# Altium PCB pcb_multilayer.pcbdoc (part 2 of 3)
Units mil, origin at the board's own origin, x right, y up, seen from the top; angles counter-clockwise.
Board outline 8907.73 x 8667.62 mil, 2 copper layers (Top Layer, Bottom Layer); 214 components, 207 nets, 845 pads, 446 vias.
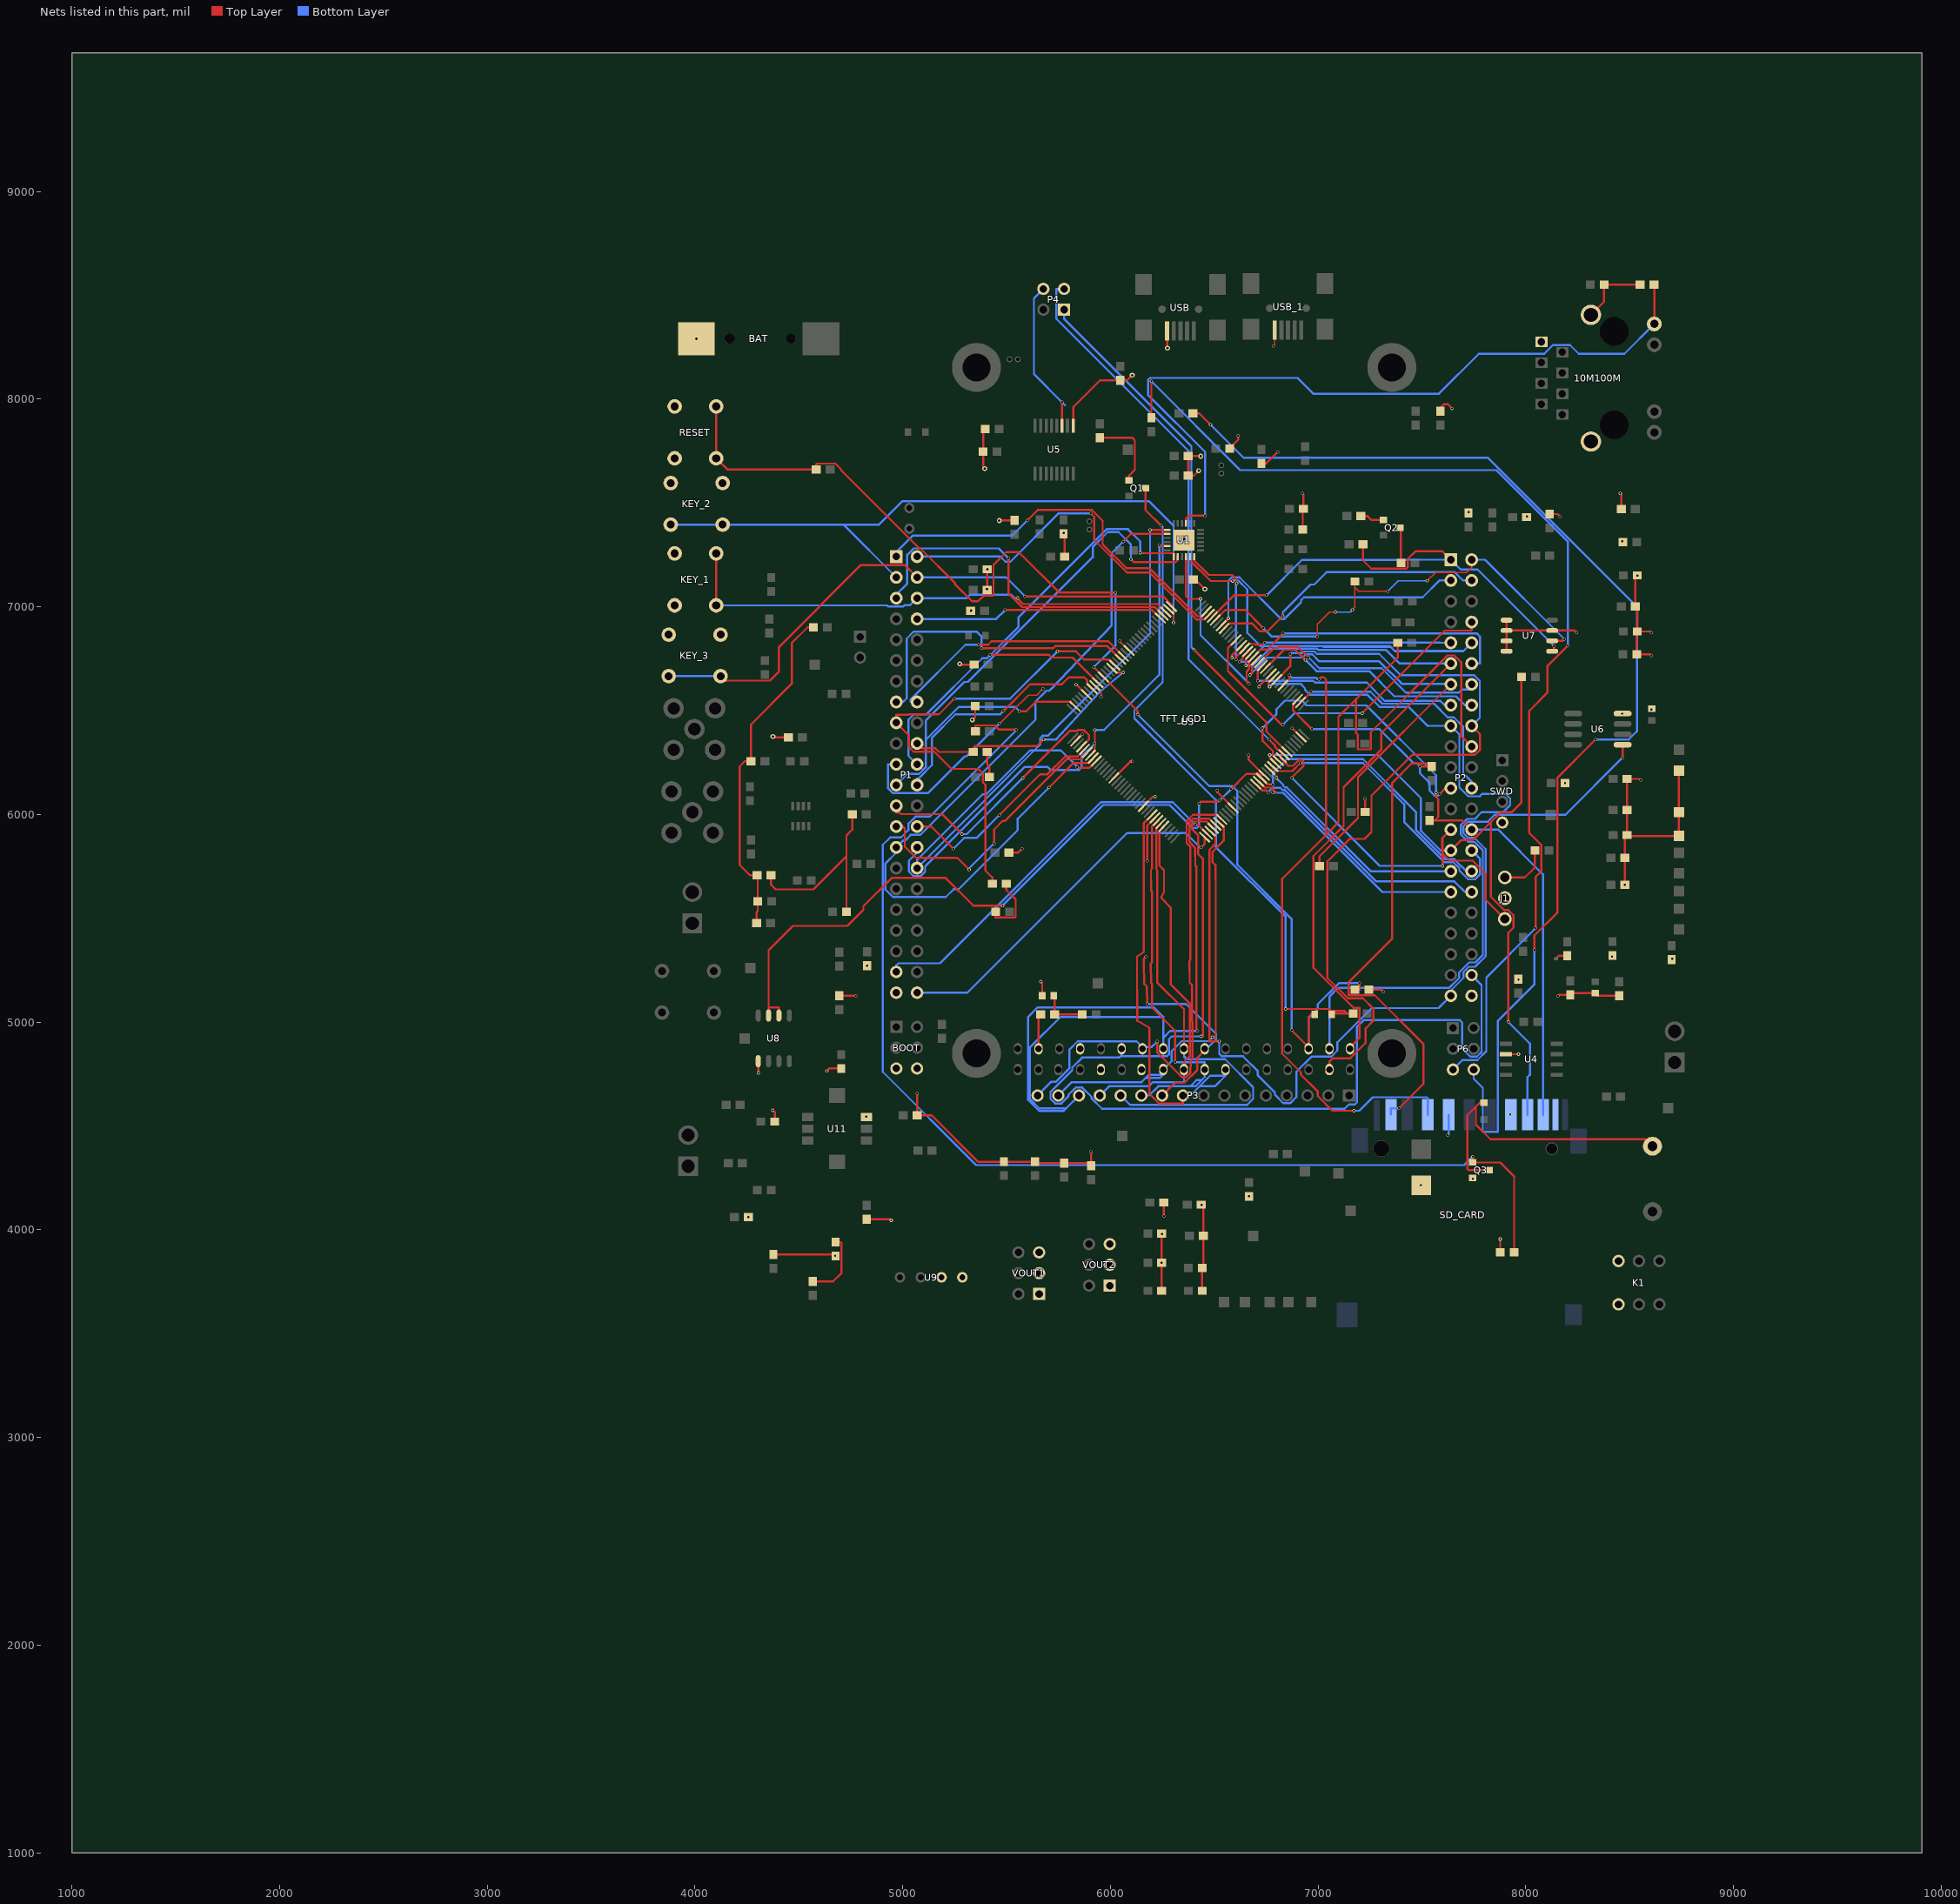
[diagram p2: the nets of this part, all layers, seen from the top]

## Via types
v1: diameter 15, hole 10, Top Layer to Bottom Layer, tented both sides, 426 vias
v2: diameter 24, hole 12, Top Layer to Bottom Layer, tented both sides, 20 vias

## Nets (pads, with @x,y where several pads share a name; then routed paths per layer and width w, separated by ;. In a path a pad name is that pad's centre, name@x,y a point inside that pad or via, vN(x,y) a via of type N, cw(c..) or ccw(c..) an arc to the next point about the centre after c; other vN are vias at no path point) (continued)
FSMC_D8: P3.9 TFT_LCD1.14 U3.64 | length 2048.6
  Top Layer w10: U3.64@6201.01,5997.75 6160,5956.74 6160,5337.34 6128,5314.84 6129,5005.72 6188,4973 6188,4654.22 6234.22,4608 6349.22,4608 P3.9@6349.22,4646.32
  Bottom Layer w10: P3.9@6349.22,4646.32 6385.32,4646.32 6431,4692 ; TFT_LCD1.14@6554.22,4771.32 6554.22,4741.22 ; 6431,4692 6480.22,4741.22 6554.22,4741.22 ; 6431,4692 6505,4692 6554.22,4741.22
FSMC_D9: P3.10 TFT_LCD1.15 U3.65 | length 1752.1
  Top Layer w10: v1@6169.83,5314.65 6161.15,5305.96 6161.15,5286.49 6162.21,5184 6175.64,5172 v1(6177,5087) ; v1@6177.77,5776 6177,5945.47 U3.65@6215.39,5983.86 ; P3.10@6249.22,4646.32 6311.9,4709 6357.9,4709 6419,4770.1 6419,4827.78 6454.22,4863 TFT_LCD1.15@6454.22,4871.32
  Mid-Layer 1 w10: v1(6171.62,5315.28) 6177.85,5321.51 v1@6177.85,5775.56
  Bottom Layer w10: v1(6177,5087) 6364.98,5087 6509.13,4942.85 6509.13,4917.38 6463.07,4871.32 TFT_LCD1.15@6454.22,4871.32
  other v1: 6178.08,5776.7
FSMC_D10: P3.11 TFT_LCD1.16 U3.66 | length 1851.2
  Top Layer w10: U3.66@6229.06,5970.66 6200.47,5942.07 6200.47,5740.97 6195.47,5732.55 6196,5636 6200.47,5625.71 6200.47,5287.14 6194.42,5281.35 6195.73,5188.45 6200.47,5183.72 6200.47,5069.53 6311,4959 v1(6311,4808)
  Bottom Layer w10: P3.11@6149.22,4646.32 6186.04,4646.32 6230.54,4690.82 6384.72,4690.82 ; v1(6311,4808) 6312,4807 6454.22,4807 TFT_LCD1.16@6454.22,4771.32 6454.22,4735 6439.26,4720.04 ; 6384.72,4690.82 6413.94,4720.04 6439.26,4720.04 ; 6384.72,4690.82 6410.04,4690.82 6439.26,4720.04
FSMC_D11: P3.12 TFT_LCD1.17 U3.67 | length 2329.1
  Top Layer w10: U3.67@6243.45,5956.77 6222,5935.32 6222,5735.97 6225,5730.45 6225,5190.89 6354.22,5061.67 TFT_LCD1.17@6354.22,4871.32
  Bottom Layer w10: P3.12@6049.22,4646.32 6094.54,4601 6658.86,4601 ; TFT_LCD1.17@6354.22,4871.32 6354.22,4836.5 ; 6657.4,4601 6687.2,4630.8 6687.2,4685.8 6552,4821 6369.72,4821 ; 6354.22,4836.5 6369.72,4821 ; 6354.22,4836.5 6354.22,4831.78 6365,4821 6369.72,4821
FSMC_D12: P3.13 TFT_LCD1.18 U3.68 | length 1752.1
  Top Layer w10: U3.68@6257.83,5942.87 6236,5920.29 6236,5753.67 6258,5731.67 6258,5626 6244.68,5599.53 6291,5549 6291,5180.53 6382,5089.53 6382,4836 6354.22,4808.22 TFT_LCD1.18@6354.22,4771.32
  Bottom Layer w10: P3.13@5949.22,4646.32 5993.72,4690.82 6184.72,4690.82 6204.72,4710.82 6272,4710.82 6354.22,4710.82 6354.22,4756 TFT_LCD1.18@6354.22,4771.32
FSMC_D13: P3.14 TFT_LCD1.19 U3.77 | length 4029.7
  Top Layer w10: v1(6418,4957) 6414.66,4957 6414.66,5747.31 6408.7,5753.98 6408.28,5836 6380.34,5871.05 6380.34,5962.03 6397.31,5979 6476.35,5979 U3.77@6508.11,5947.24
  Bottom Layer w10: P3.14@5849.22,4646.32 5787.18,4584.28 ; TFT_LCD1.19@6254.22,4871.32 6254.22,4923.22 ; v1(6418,4957) 6288,4957 6254.22,4923.22 ; 5787.18,4584.28 5658.18,4584.28 5611.51,4630.95 5611.51,4875.95 5760.56,5025 6254.22,5025 ; 5787.18,4584.28 5774.9,4572 5657,4572 5604,4625 5604,5025 5649,5070 6209.22,5070 6254.22,5025 ; 6254.22,4923.22 6254.22,5025
FSMC_D14: P3.15 TFT_LCD1.20 U3.78 | length 2079.7
  Top Layer w10: v1(6491.87,4926.87) 6507.18,4926.87 6507.18,5620 6505.88,5755.64 6491.61,5769.91 6491.61,5819.66 6545.25,5873.3 6545.25,5938.39 U3.78@6522.01,5961.63
  Bottom Layer w10: P3.15@5749.22,4646.32 5813.72,4710.82 6150.54,4710.82 6170.54,4730.82 ; TFT_LCD1.20@6254.22,4771.32 TFT_LCD1.20@6254.22,4771 ; v1(6491.87,4926.87) 6473,4908 6343.22,4908 6294.91,4859.69 6294.91,4811.69 TFT_LCD1.20@6254.22,4771 ; 6170.54,4730.82 6238.82,4730.82 TFT_LCD1.20@6254.22,4746.22 ; 6170.54,4730.82 6185.94,4746.22 TFT_LCD1.20@6254.22,4746.22 ; TFT_LCD1.20@6254.22,4746.22 TFT_LCD1.20@6254.22,4771
FSMC_D15: P3.16 TFT_LCD1.21 U3.79 | length 2450.4
  Top Layer w10: v1(6226,4907) 6226,4852.37 6342.69,4735.69 6365.69,4735.69 6385.39,4755.39 6386.46,4808.75 6395.83,4828 6393.84,5177 6381.49,5189.46 6380.57,5292.04 6385.39,5304.27 6385.39,5844.69 6367.1,5862.98 6367.1,5967.48 6397.62,5998 6513.92,5998 U3.79@6535.9,5976.02
  Bottom Layer w10: P3.16@5649.22,4646.32 5715.48,4712.58 5738.48,4712.58 5802,4776.1 5803,4777.1 5803,4868.1 5842.18,4907.28 6125.94,4907.28 6154.22,4879 6198,4879 v1(6226,4907)
FSMC_NBL0: P1.2 U3.141 | length 1800.7
  Top Layer w10: v1(5905,7450) 5922,7433 5922,7322 6079,7165 6188,7165 6414,6939 6452.98,6939 U3.141@6476.95,6962.97
  Bottom Layer w10: P1.2@5069.22,7241.32 5470.68,7241.32 5494.72,7217.28 5518.28,7217.28 5751,7450 v1(5905,7450)
FSMC_NBL1: P1.1 U3.142 | length 1919.3
  Top Layer w10: v1(5600,7416) 5650.2,7466.2 5910.8,7466.2 5963,7414 5963,7300 6077,7186 6187,7186 6419,6954 6439.7,6954 U3.142@6462.56,6976.86
  Bottom Layer w10: P1.1@4969.22,7241.32 4947,7241.32 5047.68,7342 5526,7342 v1(5600,7416)
FSMC_NE3: P2.13 R13.1 U3.125 | length 2293.6
  Top Layer w10: v1(6672,6671.5) 6672,6674 6681.6,6683.6 6681.6,6722.21 U3.125@6703.54,6744.15 ; R13.1@7007.11,5750.62 7007.11,5798 7192.11,5983 7192.11,6179.21 P2.13@7639.22,6626.32
  Bottom Layer w10: v1(6672,6671.5) 6755.5,6755 6925,6755 6941.53,6771.53 6971,6771.53 7005.53,6737 7295,6737 7403,6629 7639.22,6629 P2.13@7639.22,6626.32
FSMC_NE4: P2.11 TFT_LCD1.1 U3.127 | length 3371.5
  Top Layer w10: v1(6652,6717.5) 6652,6749.18 U3.127@6674.76,6771.94 ; TFT_LCD1.1@7154.22,4871.32 7154.22,4879 7199,4923.78 7199,5069 7170,5069 6977.34,5261.66 6977.34,5799.34 7123,5945 7123,6131 7305,6313 7305,6392.1 P2.11@7639.22,6726.32
  Bottom Layer w10: v1(6652,6717.5) 6653.5,6716 6684.5,6716 6766.03,6797.53 6995.61,6797.53 7001.87,6791.27 7327.73,6791.27 7392.68,6726.32 P2.11@7639.22,6726.32
FSMC_NOE: P2.18 TFT_LCD1.4 U3.118 | length 3826.4
  Top Layer w10: U3.118@6802.09,6648.98 6866,6712.89 v1(6866,6773) ; TFT_LCD1.4@7054.22,4771.32 7054.22,4809 7070.22,4825 7155,4825 7229,4899 7229,4969 7265.77,5005.77 7265.77,5064.77 7216.54,5114 7143.54,5114 7044.54,5212.99 7044.54,5773.54 7153,5882 7224,5882 7257,5915 7257,6090 7454,6287 7755.46,6287 7780,6311.54 7780,6385.54 P2.18@7739.22,6426.32
  Bottom Layer w10: v1(6866,6773) 6870.52,6777.52 6925.61,6777.52 6932.62,6784.53 6982.61,6784.53 6994.14,6773 7294,6773 7397,6670 7751.6,6670 7778.47,6643.13 7778.47,6465.25 7739.22,6426 P2.18@7739.22,6426.32
FSMC_NWE: P2.17 TFT_LCD1.3 U3.119 | length 3705.6
  Top Layer w10: v1(6767,6615) 6761.8,6615 6761.8,6635.56 U3.119@6788.42,6662.18
  Bottom Layer w10: v1(6767,6615) 6781,6629 6915.5,6629 6936.83,6607.67 6936.83,6599.67 6961,6575.5 7238.11,6575.5 7295.61,6518 7435,6518 7527,6426 7639.06,6426.16 P2.17@7639.22,6426.32 7680,6385.54 7680,6130.34 7723.17,6087.17 7778.17,6087.17 7789.48,6098.48 7902.52,6098.48 7925.14,6075.86 7925.14,6044.86 7891.4,6011.12 7788.12,6011.12 7755.32,5978.32 7717.32,5978.32 7686.91,5947.91 7686.91,5904.09 7724,5867 7754,5867 7793.35,5827.65 7793.35,5322.35 7758,5287 7727,5287 7679,5239 7679,5212 7632,5165 7097,5165 7054.22,5122.22 TFT_LCD1.3@7054.22,4871.32
GND: 10M100M.8 10M100M.13 10M100M.14 BAT.2 BOOT.5 BOOT.6 C1.1 C2.1 C3.1 C4.1 C5.1 C6.1 C7.1 C8.1 C9.1 C10.1 C11.1 C12.1 C13.1 C14.1 C15.1 C16.1 C17.1 C18.2 C19.1 C20.1 C21.1 C22.1 C23.1 C24.1 C25.2 C26.2 C27.1 C28.1 C29.1 C30.1 C31.1 C32.1 C33.1 C34.1 C35.1 C36.1 C37.1 C38.1 C39.1 C40.1 C41.1 C42.1 C43.1 C44.2 C45.2 C46.2 C47.1 C48.1 C49.1 C50.1 C51.1 C52.2 C53.2 C54.1 C55.2 C57.2 C59.1 C69.1 C71.1 D9.1 GND.P$1 J1.2 KEY_1.1 KEY_2.1 KEY_3.1 P1.43 P2.44 POWER.2 Q3.2 R6.2 R7.2 R8.1 R9.1 R11.1 R12.1 R19.2 R35.1 R43.1 R49.1 R58.2 R59.2 RESET.2 SD_CARD.3 SD_CARD.6 SWD.4 TFT_LCD1.22 TFT_LCD1.26 TFT_LCD1.27 TP1.P$1 U1.25 U3.16 U3.31 U3.38 U3.51 U3.61 U3.83 U3.94 U3.107 U3.120 U3.130 U4.2 U5.1 U6.4 U7.1 U7.2 U7.3 U7.4 U7.7 U8.5 U9.3 U9.4 U11.4 USB.5 USB_1.5 VOUT1.1 VOUT1.3 VOUT1.5 VOUT2.1 VOUT2.3 VOUT2.5 | length 42495.3
  Top Layer w6: v1(6785,8255) 6791,8261 USB_1.5@6791,8333
  Top Layer w10: U8.5@4304.22,4811.32 v1(4305,4755) ; v1(4375,4575) 4384.11,4565.89 R58.2@4384.11,4520.62 ; v2(4375,6375) 4379.38,6370.62 R59.2@4450.11,6370.62 ; C29.1@4377.11,3880.62 4670.11,3880.62 POWER.2@4677.11,3873.62 ; v1(4635,4765) 4646.32,4776.32 C69.1@4704.22,4776.32 ; C51.1@4694.22,5126.32 4773.68,5126.32 v1(4775,5125) ; C59.1@4827.11,4050.62 4939.38,4050.62 v1(4945,4045) ; v1(5069.22,4655) C50.1@5069.22,4551.32 5138.68,4551.32 5362.38,4327.62 C55.2@5487.11,4327.62 C45.2@5637.11,4327.62 5644.11,4320.62 C48.1@5777.11,4320.62 5894.11,4320.62 C44.2@5907.11,4307.62 5907.11,4372.89 v1(5905,4375) ; v2(5275,6725) 5278.68,6721.32 C27.1@5344.22,6721.32 ; v2(5335,6455) 5349.22,6469.22 C28.1@5349.22,6521.32 ; v2(5395,7665) 5387.22,7672.78 C53.2@5387.22,7746.32 5387.22,7846.32 C52.2@5397.22,7856.32 ; C43.1@5407.11,7080.62 v2(5407.11,7180.62) ; v2(5465,7415) 5466.32,7416.32 C22.1@5539.22,7416.32 ; C25.2@5511.22,5816.32 5556.32,5816.32 v1(5575,5835) ; v1(5665,5195) 5671.67,5188.33 C17.1@5671.67,5126.32 ; C23.1@5774.22,7351.32 5779.22,7346.32 C20.1@5779.22,7241.32 ; U5.1@5821.22,7871.32 5821.22,7961.22 5950.62,8090.62 C47.1@6047.12,8090.62 6080.62,8090.62 v2(6105,8115) ; U3.38@5832.7,6353.42 v1(5865,6385) ; v1(5835,6625) 5846.77,6615 U3.31@5884.67,6577.1 ; U3.51@6016.86,6175.59 6096.27,6255 v1(6105,6255) ; v1(6045,6835) 6045,6833.89 U3.16@6089.59,6789.3 ; U3.61@6158.57,6038.74 6204.83,6085 v1(6215,6085) ; C33.1@6247.11,3705.62 v1(6247.11,3840.62) C35.1@6247.11,3980.62 ; v1(6257.11,4065) C36.1@6257.11,4130.62 ; USB.5@6273.11,8328.62 6273.11,8246.89 v2(6275,8245) ; R8.1@6399.22,7131.32 6408.68,7131.32 v2(6455,7085) ; v2(6425,7655) 6401.32,7631.32 C2.1@6374.22,7631.32 C1.1@6374.22,7726.32 6433.68,7726.32 v2(6435,7725) ; C54.1@6437.11,4120.62 6447.11,4110.62 C32.1@6447.11,3970.62 6447.11,3820.62 C31.1@6442.11,3815.62 C30.1@6442.11,3705.62 ; v1(6515,6115) 6515,6107.21 U3.83@6590.08,6032.13 ; C7.1@6574.22,7761.32 6574.22,7764.22 6615,7805 v1(6615,7825) ; v1(6585,6755) 6585,6765.6 U3.130@6632.32,6812.92 ; v1(6665,6285) 6665,6264.04 U3.94@6740.82,6188.22 ; v1(6715,6615) 6715,6617.04 U3.120@6774.03,6676.07 ; C6.1@6727.11,7690.62 6750.62,7690.62 v1(6805,7745) ; v1(6875,6415) 6876.03,6415 U3.107@6918.66,6372.37 ; v1(6925,7545) 6929.22,7540.78 R9.1@6929.22,7471.32 6926.22,7468.32 R19.2@6926.22,7371.32 ; v1(7225,6075) 7226.22,6073.78 C26.2@7226.22,6011.32 ; C24.1@7244.22,5156.32 7303.68,5156.32 v1(7315,5145) ; C14.1@7589.22,7941.32 7589.22,7959.22 7605,7975 7625,7975 v1(7645,7955) ; R49.1@7877.12,3890.62 v1(7877.12,3955) ; U4.2@7904.61,4845.62 v1(7965,4845) ; U7.4@7907.11,6785.62 U7.3@7907.11,6835.62 U7.2@7907.11,6885.62 ; U7.1@7907.11,6935.62 U7.2@7907.11,6885.62 ; C13.1@8114.22,7446.32 8153.68,7446.32 v1(8165,7435) ; v1(8145,5305) 8159.32,5319.32 C57.2@8199.22,5319.32 ; v1(8155,5125) 8161.32,5131.32 C38.1@8214.22,5131.32 8221.67,5138.77 C18.2@8334.22,5138.77 8346.67,5126.32 C49.1@8449.22,5126.32 ; v1(8245,6875) 8234.38,6885.62 U7.7@8127.11,6885.62 U7.2@7907.11,6885.62 ; 10M100M.14@8313.61,8405.62 8377.11,8469.12 R12.1@8377.11,8550.62 R6.2@8550.11,8550.62 ; v1(8455,7545) 8460.12,7539.88 R7.2@8460.12,7470.62 ; v1(8477.11,5660.62) C9.1@8477.11,5790.62 8477.11,5890.62 C16.1@8487.11,5900.62 ; v1(8537.11,7150.62) 8527.11,7140.62 C40.1@8527.11,7000.62 8537.11,6990.62 C41.1@8537.11,6880.62 ; v1(8555,6165) 8549.38,6170.62 C8.1@8487.11,6170.62 C15.1@8487.11,6020.62 C16.1@8487.11,5900.62 ; v1(8605,6765) 8599.38,6770.62 C46.2@8534.11,6770.62 8534.11,6877.62 C41.1@8537.11,6880.62 ; v1(8605,6875) 8599.38,6880.62 C41.1@8537.11,6880.62 ; TP1.P$1@8737.11,6210.62 GND.P$1@8737.11,6010.62 GND.P$1@8737.11,5895.62 8492.11,5895.62 C16.1@8487.11,5900.62
  Mid-Layer 1 w6: v2(6275,8245) 6775,8245 v1(6785,8255) ; v2(6455,7085) 6455,6995 6535,6915 6535,6895 6585,6845 v1(6585,6755)
  Mid-Layer 1 w10: 4005,8275 3902.11,8172.11 3902.11,8135 RESET.2@3902.11,7964.62 RESET.2@3902.11,7714.62 3902.11,7614.62 KEY_2.1@3883.11,7595.62 ; KEY_3.1@4123.11,6865.62 KEY_3.1@3873.11,6865.62 ; KEY_2.1@4133.11,7595.62 KEY_2.1@3883.11,7595.62 ; v1@4255,4055 4265,4045 v1(4945,4045) ; v1(4305,4755) 4295,4745 4295,4705 4375,4625 v1(4375,4575) 4425,4575 4615,4765 v1(4635,4765) ; v1(4675,3875) 4685,3885 4845,3885 4945,3985 v1(4945,4045) ; 4825,5265 4775,5215 v1(4775,5125) 4775,4995 4635,4855 v1(4635,4765) ; v1(4829.22,5271.32) 4839.22,5271.32 P1.43@4969.22,5141.32 ; BOOT.5@4969.22,4776.32 BOOT.6@5069.22,4776.32 v1(5069.22,4655) 4875,4655 4835,4615 4835,4555 v1(4825,4545) 4825,4595 4655,4765 v1(4635,4765) ; v2@5265,6725 v2(5275,6725) ; v2@5325,6985 5345,6965 5345,6915 5305,6875 5295,6875 5275,6855 v2(5275,6725) ; v2(5335,6455) 5215,6455 5135,6535 5135,6585 ; v2(5405,7085) 5415,7075 5455,7085 5465,7075 ; v2(5407.11,7180.62) 5407.11,7357.11 v2(5465,7415) ; VOUT1.1@5657.11,3690.62 VOUT1.3@5657.11,3790.62 ; v1(5775,7355) 5705,7285 5495,7285 5465,7315 v2(5465,7415) ; VOUT2.1@5997.11,3730.62 VOUT2.3@5997.11,3830.62 ; v1(6045,6835) 6015,6835 5985,6805 5985,6785 6115,6655 6115,6625 5995,6505 5965,6505 5845,6625 v1(5835,6625) 5795,6575 5795,6515 5865,6445 v1(5865,6385) 5885,6405 5895,6405 6045,6255 v1(6105,6255) ; TFT_LCD1.22@6149.22,4771.32 6149.22,4790.78 6125,4815 6025,4815 5981.32,4771.32 TFT_LCD1.26@5954.22,4771.32 ; v1@6245,3975 6257.11,3987.11 v1(6257.11,4065) 6385,4065 v1(6438.87,4118.86) 6628.86,4118.86 v1@6665,4155 ; v1(6247.11,3840.62) 6201.49,3795 6095,3795 6059.38,3830.62 VOUT2.3@5997.11,3830.62 ; v2(6425,7655) 6445,7655 6475,7625 6475,7365 6435,7325 v2(6355,7325) 6355,7175 6345,7165 6345,7085 6355,7075 6415,7075 6445,7075 v2(6455,7085) ; v1(6585,6755) 6585,6675 6655,6605 6705,6605 v1(6715,6615) 6715,6575 6835,6455 v1(6875,6415) ; v1(6925,7545) 6805,7665 v1(6805,7745) 6725,7825 v1(6615,7825) 6465,7825 6435,7795 v2(6435,7725) 6435,7735 6105,8065 v2(6105,8115) 6215,8235 6225,8242.83 6235,8245 v2(6275,8245) 5695,7665 v2(5395,7665) 5395,7445 5425,7415 v2(5465,7415) ; v1(7315,5145) 7385,5075 7695,5075 7739.22,5119.22 P2.44@7739.22,5126.32 ; v1(7495,4215) 7525,4245 v1(7745,4245) ; v1(7645,7955) 7725,7875 v1(7725,7455) 7745,7435 v1(8005,7435) v1(8165,7435) 8355,7435 8455,7535 v1(8455,7545) ; v1(7877.12,3955) 7877.12,4112.88 v1(7745,4245) ; J1.2@7899.22,5596.32 7955,5652.1 7955,5765 7887.11,5832.89 SWD.4@7887.11,5960.62 ; v1(8189.22,6151.32) 8189.22,6079.22 8065,5955 7892.73,5955 SWD.4@7887.11,5960.62 ; 8195,6145 8215,6125 8555,6125 v1(8555,6165) 8555,6265 8465,6355 v1(8465,6485) 8485,6505 v1(8605,6505) v1(8605,6765) ; v1(8245,6875) 8325,6875 8385,6935 8585,6935 8605,6915 v1(8605,6875) ; 10M100M.14@8313.61,8405.62 8183.61,8275.62 10M100M.8@8075.61,8275.62 8264.38,8275.62 8285,8255 8285,7824.23 10M100M.13@8313.61,7795.62 8313.61,7686.39 v1(8455,7545) ; v1@8475,5655 8475,5585 8415,5525 v1(8415,5315) ; v1@8535,7145 8525,7155 8525,7215 8465,7275 v1(8465,7315) 8455,7325 v1(8455,7545) ; v1(8705,5305) 8615,5305 8605,5315 v1(8415,5315) ; KEY_3.1@3873.11,6865.62 3873.11,6863.11 3815,6805 3815,6235 4145,6235 4275,6365 4365,6365 v2(4375,6375) 4375,6335 4395,6315 4595,6315 4745,6465 4825,6465 4845,6485 4845,6525 4905,6585 5135,6585 ; KEY_3.1@3873.11,6865.62 3902.11,6894.62 KEY_1.1@3902.11,7006.62 KEY_1.1@3902.11,7256.62 3873.73,7285 3835,7285 3815,7305 3815,7475 3883.11,7543.11 KEY_2.1@3883.11,7595.62 ; v1(4945,4045) 5187.11,3802.89 U9.3@5187.11,3770.62 U9.4@5287.11,3770.62 5312.73,3745 5625,3745 5657.11,3777.11 VOUT1.3@5657.11,3790.62 ; 5135,6585 v2(5275,6725) ; 5420.81,6980.81 v2(5329.19,6980.81) 5420.81,6980.81 ; 5420.81,6980.81 5465,7025 ; 5420.81,6980.81 5465,7025 ; 5465,7025 5465,7075 ; 5465,7025 5465,7075 ; VOUT1.3@5657.11,3790.62 VOUT1.5@5657.11,3890.62 5662.73,3885 5975,3885 5997.11,3907.11 VOUT2.5@5997.11,3930.62 ; TFT_LCD1.26@5954.22,4771.32 5954.22,4744.22 5905,4695 v1(5905,4375) 5985,4375 6015,4345 6015,3948.51 VOUT2.5@5997.11,3930.62 ; TFT_LCD1.26@5954.22,4771.32 TFT_LCD1.27@5854.22,4871.32 5828.68,4871.32 5795,4905 5795,5145 5745,5195 v1(5665,5195) 5575,5285 v1(5575,5835) 5945,6205 5965,6205 6015,6255 v1(6105,6255) ; VOUT2.3@5997.11,3830.62 VOUT2.5@5997.11,3930.62 ; v1(6105,6255) 6155,6205 6155,6165 6215,6105 v1(6215,6085) 6245,6115 v1(6515,6115) 6495,6135 6495,6155 6515,6175 6625,6285 v1(6665,6285) 6725,6345 6775,6395 6795,6415 v1(6875,6415) ; v1(6875,6415) 6885,6415 7045,6255 v1(7225,6075) 7305,6075 7315,6065 7315,6015 7355,5975 7775,5975 7789.38,5960.62 SWD.4@7887.11,5960.62 ; P2.44@7739.22,5126.32 7886.32,5126.32 v1(7965,5205) 8075,5205 v1(8155,5125) 8145,5135 v1(8145,5305) 8145,5285 8175,5255 8405,5255 8415,5265 v1(8415,5315) ; P2.44@7739.22,5126.32 7825,5040.54 7825,4995 7855,4965 7895,4965 7965,4895 v1(7965,4845) 7965,4745 7925,4705 v1(7925,4555) 7925,4475 7905,4455 v1(7625,4455) 7625,4355 7735,4245 v1(7745,4245)
  Bottom Layer w10: v1(7625,4455) 7628.55,4458.55 SD_CARD.3@7628.55,4553.54
  other v1: 6248.87,3978.86 6248.87,3978.86 4257.11,4060.62 6667.11,4160.62 8465,7315
  other v2: 4007.11,8290.62
IIC_SCL: P2.2 R41.2 U3.139 U7.6 | length 2313.6
  Top Layer w6: v1(6996,6856) 6996,6916 7055,6975 v1(7085,6975) ; v1(7165,6985) 7177.22,6997.22 R41.2@7177.22,7121.32 7177.22,7092.78 7195,7075 v1(7335,7075) ; v1(7525,7125) 7565,7165 7715,7165 7739.22,7189.22 P2.2@7739.22,7226.32
  Top Layer w10: U3.139@6505,6935.87 6554.13,6985 6649,6985 v1(6736,6898) ; U7.6@8127.11,6835.62 8177.62,6835.62 v1(8186,6844)
  Bottom Layer w6: v1(7085,6975) 7155,6975 v1(7165,6985) ; v1(7335,7075) 7385,7125 v1(7525,7125)
  Bottom Layer w10: v1(6736,6898) 6778,6856 v1(6996,6856) ; P2.2@7739.22,7226.32 7803.68,7226.32 v1(8186,6844)
IIC_SDA: P2.1 R42.2 U3.140 U7.5 | length 2559.3
  Top Layer w10: U3.140@6490.61,6949.77 6595.84,7055 v1(6752,7055) ; R42.2@7216.22,7301.32 7216.22,7223 7256,7183.22 7424.22,7183.22 7432,7191 7432,7230 7470,7268 7597.54,7268 P2.1@7639.22,7226.32 ; U7.5@8127.11,6785.62 8136,6785.62 v1(8136,6811)
  Bottom Layer w10: v1(6752,7055) 6923,7226 7432,7226 7432.32,7226.32 P2.1@7639.22,7226.32 7686.54,7179 7768,7179 v1(8136,6811)
J1_3: J1.3 R48.1 | length 246.5
  Top Layer w10: J1.3@7899.22,5696.32 7995.54,5696.32 8044.22,5745 R48.1@8044.22,5826.32
K1_1: K1.1
K1_6: K1.6
KEY0: KEY_1.2 P1.6 U3.3 | length 2477.9
  Top Layer w10: KEY_1.2@4102.11,7006.62 KEY_1.2@4102.11,7256.62 ; v1(5553,7042) 5553,7040 5580,7013 6227.88,7013 U3.3@6267.43,6973.45
  Bottom Layer w10: KEY_1.2@4102.11,7006.62 4923.38,7006.62 4928.33,7001.67 ; 4928,7001 4928.33,7001.67 ; v1(5553,7042) 5537,7042 5520.74,7058.26 5324.76,7058.26 5307.82,7041.32 P1.6@5069.22,7041.32 5035.9,7008 5009.68,7008 5003.35,7001.67 4928.33,7001.67
KEY1: KEY_2.2 P1.3 U3.2 | length 3417.8
  Top Layer w10: U3.2@6281.32,6987.84 6304,6965.16 v1(6304,6923)
  Bottom Layer w10: KEY_2.2@3883.11,7395.62 KEY_2.2@4133.11,7395.62 4714.92,7395.62 ; P1.3@4969.22,7141.32 4714.92,7395.62 ; v1(6304,6923) 6304,7390 6185.24,7508.76 4998.76,7508.76 4885.62,7395.62 4714.92,7395.62
KEY2: KEY_3.2 P1.4 U3.1 | length 2829.9
  Top Layer w10: KEY_3.2@4123.11,6665.62 4123.11,6644 4360,6644 4404,6688 4404,6806 4799,7201 5009.54,7201 P1.4@5069.22,7141.32 ; v1(5589,7050) 6253.52,7050 6294.52,7009 U3.1@6294.52,7001.51
  Bottom Layer w10: KEY_3.2@3873.11,6665.62 KEY_3.2@4123.11,6665.62 ; P1.4@5069.22,7141.32 5497.68,7141.32 v1(5589,7050)
L2_2: C64.2 C66.2 L2.2 L3.1 R52.1 | length 1665.1
  Top Layer w10: C64.2@4297.22,5476.32 4297.22,5529 4302.22,5534 C66.2@4302.22,5581.32 4302.22,5706.32 R52.1@4299.22,5706.32 4265,5706.32 4214.86,5756.46 4214.86,6230.86 4240.32,6256.32 L3.1@4269.22,6256.32 4269.22,6432.22 4466,6629 4466,6825 4541.62,6900.62 L2.2@4570.11,6900.62
LCD_BL: P2.42 TFT_LCD1.23 U3.76 | length 5233.6
  Top Layer w10: v1(6437,4931) 6446,4931 6446,5785.23 6421.73,5809.5 6421.73,5900.27 6393.57,5928.43 6393.57,5956.43 6402.63,5965.5 6462.99,5965.5 U3.76@6494.91,5933.58
  Bottom Layer w10: TFT_LCD1.23@6054.22,4871.32 6054.22,4841 ; v1(6437,4931) 6295.24,4931 6281.91,4917.67 6281.91,4844.67 6273,4835.76 6054.22,4835.76 6054.22,4841 ; P2.42@7739.22,5226.32 7787,5178.54 7787,4855.61 7765.08,4833.69 7733.08,4833.69 7694,4872.77 7694,4997.77 7682.69,5009.09 7219.09,5009.09 7187.24,4977.24 7187.24,4613.24 7177,4603 7148,4603 7127.49,4582.49 5959.51,4582.49 5910,4632 5910,4639 5864.65,4684.35 5833.35,4684.35 5798,4649 5798,4642 5764.18,4608.18 5734.23,4608.18 5711.61,4630.81 5711.61,4662.61 5816,4767 5816,4781 5864,4829 6042.22,4829 6054.22,4841
LED0: LED0.2 P1.17 U3.21 | length 2344.8
  Top Layer w10: v1(5250,6558) 5174,6482 5031,6482 5028,6479 4969.22,6479 P1.17@4969.22,6441.32 5029,6381.54 5029,6325.54 5052.54,6302 5152,6302 5235,6219 5364.12,6219 5386,6197.12 5386,6154.12 5397.85,6142.26 5397.85,5730.15 5432.22,5695.78 LED0.2@5432.22,5666.32 ; v1(5745,6785) 5834,6785 5873,6746 5994.33,6746 U3.21@6021.52,6718.81
  Bottom Layer w10: v1(5250,6558) 5518,6558 v1(5745,6785)
LED0_1: LED0.1 R44.1 | length 303.3
  Top Layer w10: R44.1@5447.12,5530.62 5447.12,5503.12 5539.54,5503.12 5543.78,5507.36 5543.78,5591.22 5499.22,5635.78 LED0.1@5499.22,5666.32
LED1: LED1.2 P1.20 U3.22 | length 1245.5
  Top Layer w10: P1.20@5069.22,6341.32 5092.17,6318.37 5156.75,6318.37 5174.5,6300.62 LED1.2@5340.11,6300.62 5340.11,6321 5348.11,6329 5646,6329 v1(5678,6361) ; U3.22@6007.62,6704.42 6029.04,6683 6062,6683 v1(6062,6684)
  Bottom Layer w10: v1(5678,6361) 5739,6361 5945,6585 5955,6595 v1(6062,6684)
LED1_1: LED1.1 R45.1 | length 124.1
  Top Layer w10: LED1.1@5407.11,6300.62 5407.11,6241 5417.11,6231 R45.1@5417.11,6180.62
LINK_LED: 10M100M.12 R6.1 U1.3 | length 3725.9
  Top Layer w10: U1.3@6364.06,7401.32 6364.06,7425.38 6377,7438.32 v1(6456,7438.32) ; R6.1@8617.11,8550.62 8618.61,8550.62 10M100M.12@8618.61,8361.62
  Bottom Layer w10: v1(6456,7438.32) 6456,7746 6181.26,8020.74 6181.26,8092.46 6190.46,8101.66 6901.34,8101.66 6977,8026 7582,8026 7774,8218 8089,8218 8130.72,8259.72 8213.28,8259.72 8255,8218 8474.99,8218 10M100M.12@8618.61,8361.62
P6_5: P6.5 R37.1 | length 5361.9
  Top Layer w10: R37.1@6197.12,7910.62 v1(6197.12,8086) ; v1(8048,5452) 8048,5699 8074.16,5725.16 8074.16,5853.84 8016.18,5911.82 8016.18,6498.18 8105,6587 8105,6715 v1(8202,6812)
  Bottom Layer w10: v1(6197.12,8086) 6625.12,7658 7858,7658 8202,7314 v1(8202,6812) ; P6.5@7649.22,4771.32 7694.9,4817 7766.9,4817 7810,4860.1 7810,5214 v1(8048,5452)
P6_6: P6.6 R38.1 | length 5814.2
  Top Layer w10: R38.1@6397.11,7930.62 6428.61,7930.62 v1(6482.23,7877) ; v1(8040.61,5346.01) 8040.61,5415.61 8153,5528 8153,6177 v1(8337,6361)
  Bottom Layer w10: v1(6482.23,7877) 6642.23,7717 7817.78,7717 8534.89,6999.89 8534.89,6399.89 8496,6361 v1(8337,6361) ; P6.6@7749.22,4771.32 7749.22,4726.78 7793,4683 7793,4470.54 7865,4470.54 7865,5005 8040.61,5180.61 v1(8040.61,5346.01)
PA1: P1.23 U1.14 U3.35 | length 2963.3
  Top Layer w10: v1(5562,6497) 5595,6497 5639.8,6541.8 5808.26,6541.8 U3.35@5829.79,6520.27 ; v1(6099,7229) 6113,7215 6314.69,7215 6324.69,7225 U1.14@6324.69,7241.32
  Bottom Layer w10: P1.23@4969.22,6141.32 5022.9,6195 5078.9,6195 5111,6227.1 5111,6358.1 ; v1(5562,6497) 5541,6518 5270.9,6518 5111,6358.1 ; v1(6099,7229) 6099,7299.8 6039.16,7359.64 5987.16,7359.64 5915,7287.48 5915,7238.48 5314.21,6637.69 5297.21,6637.69 5111,6451.48 5111,6358.1
PA4: P1.25 U3.40 | length 1291.7
  Top Layer w10: P1.25@4969.22,6041.32 4969.22,6009 4984,6009 4992,6001 5190,6001 v1(5286,5905) ; v1(5578,6175) 5806,6403 5841.28,6403 5844.1,6405.83 5873.32,6405.83 5897,6382.15 5897,6361.15 U3.40@5861.48,6325.63
  Bottom Layer w10: v1(5286,5905) 5308,5905 v1(5578,6175)
PA5: P1.28 U3.41 | length 1047.7
  Top Layer w10: P1.28@5069.22,5941.32 5137.68,5941.32 v1(5244,5835) ; v1(5465,5996) 5662.59,6193.59 5697,6193.59 5782.41,6279 5841.72,6279 U3.41@5875.15,6312.43
  Bottom Layer w10: v1(5244,5835) 5295.5,5886.5 5355.5,5886.5 v1(5465,5996)
PA6: P1.27 U3.42 | length 1333.8
  Top Layer w10: P1.27@4969.22,5941.32 5001,5941.32 5010,5932.32 5010,5845.32 5064.32,5791 5263,5791 v1(5320,5734) ; v1(5440,5860.5) 5440,5927.05 5482.13,5969.18 5493.13,5969.18 5788.95,6265 5855.99,6265 U3.42@5889.53,6298.54
  Bottom Layer w10: v1(5320,5734) 5320,5740.5 v1(5440,5860.5)
PA7: P1.30 U1.11 U3.43 | length 2575.5
  Top Layer w10: U3.43@5903.92,6284.65 5925,6305.73 v1@5925,6340 ; v1(5924,6341) v1@5925,6340 ; v1(5925,6407) v1@5925,6340 ; v1(6236,7297) 6241.21,7291.79 U1.11@6274.22,7291.79
  Bottom Layer w10: P1.30@5069.22,5841.32 5069.22,5816 5029.91,5776.69 5029.91,5724.95 5052.54,5702.32 5085.54,5702.32 5108.22,5725 5108.22,5750 5586.13,6227.91 5698.59,6227.91 5713.44,6213.06 5847.06,6213.06 5860.5,6226.5 5860.5,6277.5 v1(5924,6341) ; v1(5925,6407) 5970,6407 6236,6673 v1(6236,7297)
PA8: J1.1 P2.27 U3.100 | length 1916.4
  Top Layer w10: U3.100@6822.79,6273.1 6822.79,6268.71 6857.7,6233.8 6879.04,6233.8 6908.03,6262.79 6921.03,6262.79 6930.23,6253.6 6930.23,6234.23 v1(6872.5,6176.5) ; v1(7599,5752) 7599,5811.1 ; P2.27@7639.22,5926.32 7599,5886.1 ; J1.1@7899.22,5496.32 7807,5588.54 7807,5714.1 7744.1,5777 7633.1,5777 7599,5811.1 ; 7599,5811.1 7599,5886.1 ; 7599,5811.1 7598,5812.1 7598,5885.1 7599,5886.1
  Bottom Layer w10: v1(6872.5,6176.5) 7297,5752 v1(7599,5752)
PA9: P4.3 U3.101 | length 2739.2
  Top Layer w10: v1(6763.68,6360.5) 6792.47,6331.71 6792.47,6326.1 6831.08,6287.49 U3.101@6836.69,6287.49
  Bottom Layer w10: P4.3@5777.12,8530.62 5739,8530.62 5739,8388 6376,7751 6376,6748.18 v1(6763.68,6360.5)
PA10: P4.1 U3.102 | length 2574
  Top Layer w10: v1(6404,6791) 6751.25,6443.75 6751.25,6399.79 U3.102@6849.88,6301.16
  Bottom Layer w10: P4.1@5777.12,8430.62 5777,8430.62 5777,8386 6390,7773 6390,6805 v1(6404,6791)
PA15: P2.24 U3.110 | length 1187
  Top Layer w10: U3.110@6915.74,6539.23 v1(6967.51,6591)
  Bottom Layer w10: v1(6967.51,6591) 7252,6591 7310,6533 7558,6533 7624,6467 7654,6467 7699,6422 7699,6198 7739.22,6157.78 P2.24@7739.22,6126.32
PB6: P2.4 U3.136 | length 1362.6
  Top Layer w10: U3.136@6547.44,6894.89 6572.55,6920 6680.5,6920 6718.68,6881.82 6756.38,6881.82 v1(6830,6955.44)
  Bottom Layer w10: v1(6830,6955.44) 6830,6973.44 6963.62,7107.06 6981.62,7107.06 7040.48,7165.92 7658.08,7165.92 7697.68,7126.32 P2.4@7739.22,7126.32
PB7: P2.3 U3.137 | length 1475.9
  Top Layer w10: U3.137@6533.05,6908.78 v1(6568,6943.73)
  Bottom Layer w10: v1(6568,6943.73) 6568,7125 6584.26,7141.26 6621.26,7141.26 6822.87,6939.66 6836.68,6939.66 6918,7020.98 6918,7031.98 6931.14,7045.12 7503.12,7045.12 7584.32,7126.32 P2.3@7639.22,7126.32
PB12: P1.44 U3.73 | length 1771.3
  Top Layer w10: v1(6437.23,5841) 6453.23,5857 U3.73@6453.23,5890.42
  Bottom Layer w10: P1.44@5069.22,5141.32 5311.32,5141.32 6080.3,5910.3 6362.34,5910.3 6431.64,5841 v1(6437.23,5841)
PB13: P1.41 U3.74 | length 1918.9
  Top Layer w10: v1(6409.5,5950) 6421.93,5950 U3.74@6467.13,5904.8
  Bottom Layer w10: P1.41@4969.22,5241.32 4969.22,5273 4979.22,5283 5179,5283 5954.89,6058.89 6300.61,6058.89 v1(6409.5,5950)
PB14: P2.43 U3.75 U6.1 | length 4613
  Top Layer w10: U3.75@6481.02,5919.19 6505.36,5894.85 6505.36,5858.4 6476.67,5829.71 6476.67,4907 v1(6524,4907) ; v1(8466,6273) 8466,6335.62 U6.1@8466.11,6335.62
  Bottom Layer w10: v1(6524,4907) 6524,4847 6536,4835 6638,4835 6710,4763 6710,4743 6792,4661 6792,4650 6833.21,4608.79 6865.21,4608.79 6895,4638.57 6895,4760 6968,4833 7063,4833 7093,4863 7093,4902 7258,5067 7579.9,5067 P2.43@7639.22,5126.32 7639.22,5152 7700,5212.78 7700,5241 7725,5266 7756,5266 7806.91,5316.91 7806.91,5832.62 7752.53,5887 7722.53,5887 7700.11,5909.43 7700.11,5942.43 7723,5965.32 7817.2,5965.32 7850,5998.12 8191.12,5998.12 v1(8466,6273)
PC1: P1.22 U1.13 U3.27 | length 2607.3
  Top Layer w10: v1(5422,6768) 5703.93,6768 5716.93,6755 5818.48,6755 U3.27@5939.55,6633.93 ; v1(6144,7260) 6146,7258 6305.01,7258 U1.13@6305.01,7241.32
  Bottom Layer w10: P1.22@5069.22,6241.32 5028,6282.54 5028,6456 5053,6481 5113,6481 5384,6752 5406,6752 5406.34,6752.34 ; v1(5422,6768) 5406.34,6752.34 ; v1(6144,7260) 6144,7314 6084.6,7373.4 5982.07,7373.4 5558,6949.33 5558,6903.33 5406.67,6752 5406.34,6752.34
PC2: P1.21 U3.28 | length 1634.6
  Top Layer w6: v1(5466,6438.22) 5468.22,6438.22 5525,6495 5605,6575 5645,6575 v1(5675,6605) ; U3.28@5925.65,6619.54 5955,6590.19 v1(5955,6565)
  Mid-Layer 2 w6: v1(5675,6605) 5775,6605 5805,6635 5825,6635 5835,6645 5855,6645 5865,6635 5865,6565 5925,6505 5945,6505 5955,6515 v1(5955,6565)
  Bottom Layer w10: P1.21@4969.22,6241.32 4930,6241.32 4930,6125.32 4953.34,6101.98 5120.99,6101.98 5298.66,6279.66 5307.43,6279.66 v1(5466,6438.22)
PC3: P1.24 U3.29 | length 1185.3
  Top Layer w10: v1(5485,6498) 5614,6627 5766.7,6627 5799.45,6659.76 5874.15,6659.76 5889,6644.91 5889,6627.91 U3.29@5911.76,6605.15
  Bottom Layer w10: P1.24@5069.22,6141.32 5069.22,6173 5076.22,6173 5140,6236.78 5140,6368 5254,6482 5469,6482 v1(5485,6498)
PC4: P1.29 U1.8 U3.44 | length 3739.2
  Top Layer w10: v1(5705,6130) 5822.66,6247.66 5893.8,6247.66 U3.44@5917.59,6271.45 ; v1(6062,7314) 6098.85,7350.85 U1.8@6274.22,7350.85
  Bottom Layer w10: v1(5705,6130) 5554,5979 5554,5924.88 5269.17,5640.05 5246.17,5640.05 5208.06,5601.94 4953.28,5601.94 4917.22,5638 4917.22,5764 4969.22,5816 P1.29@4969.22,5841.32 5001.9,5874 5011.29,5874 5038.29,5901 5084.29,5901 5639,6455.71 5639,6543 5692.11,6596.11 5705,6595 5715,6605 6006,6910 6006,7258 v1(6062,7314)
PC5: P1.32 U1.7 U3.45 | length 3360.6
  Top Layer w10: v1(5841,6229) 5845,6225 5899.41,6225 U3.45@5931.97,6257.56 ; v1(6191,7370.53) U1.7@6274.22,7370.53
  Bottom Layer w10: v1(5841,6229) 5761.8,6308.2 5633.23,6308.2 ; v1(6191,7370.53) 6191,6871.5 5698.3,6378.8 5673.3,6378.8 5661.95,6367.45 5661.95,6336.91 5633.23,6308.2 ; 5633.23,6308.2 5398.04,6073 5398.04,6070.14 P1.32@5069.22,5741.32 5069.22,5781.22 5384.69,6096.69 5401.87,6096.69 5613.38,6308.2 5633.23,6308.2
PC6: P2.31 U3.96 | length 1084.2
  Top Layer w10: U3.96@6767.91,6216.28 6801.67,6182.52 6801.67,6177.67 v1(6799,6175)
  Bottom Layer w10: v1(6799,6175) 6831,6143 6831,6140 6840.92,6130.08 6848.92,6130.08 7252.68,5726.32 P2.31@7639.22,5726.32
PC7: P2.30 U3.97 | length 1458.6
  Top Layer w10: U3.97@6781.81,6230.66 6781.81,6221 6793,6221 6805.3,6208.7 6876.24,6208.7 v1(6914.54,6247)
  Bottom Layer w10: v1(6914.54,6247) 7216,6247 7414.5,6048.5 7414.5,5963.5 7609,5769 7652,5769 7680,5741 7680,5730 7722.89,5687.11 7755.25,5687.11 7780,5711.86 7780,5785.54 P2.30@7739.22,5826.32
PD6: P2.16 U3.122 | length 1140.9
  Top Layer w10: U3.122@6745.98,6703.16 6835.82,6793 6889.82,6793 v1(6938.82,6744)
  Bottom Layer w10: v1(6938.82,6744) 6992.82,6690 7246,6690 7367,6569 7663.32,6569 7706,6526.32 P2.16@7739.22,6526.32
PD7: P2.15 U3.123 | length 1061.2
  Top Layer w10: v1(6710,6643) 6710,6695.47 U3.123@6731.59,6717.06
  Bottom Layer w10: v1(6710,6643) 6976,6643 6985,6635 7025,6635 7038.61,6635.13 7055,6635 7235,6635 7320,6547 7588.32,6547 7609,6526.32 P2.15@7639.22,6526.32
PE5: P1.5 U3.4 | length 1707.7
  Top Layer w10: v1(5510,7233) 5510,7063 5575,6998 6214.6,6998 U3.4@6253.53,6959.07
  Bottom Layer w10: P1.5@4969.22,7041.32 4969.22,7059 5022,7111.78 5022,7249.78 5053.22,7281 5462,7281 v1(5510,7233)
PE6: P1.8 U3.5 | length 1205.2
  Top Layer w10: v1(5493,6984) 6201.74,6984 U3.5@6240.34,6945.4
  Bottom Layer w10: P1.8@5069.22,6941.32 5069.22,6941 5450,6941 v1(5493,6984)
PF6: P1.16 U3.18 | length 1215.3
  Top Layer w10: v1(5364.5,6817) 5411,6817 5428,6834 5989.75,6834 U3.18@6062.5,6761.25
  Bottom Layer w10: P1.16@5069.22,6541.32 5037,6541.32 5037,6552 5302,6817 v1(5364.5,6817)
PF7: P1.15 U3.19 | length 1484.1
  Top Layer w10: v1(5380,6801) 5380,6800 5724.5,6800 5734.5,6810 5985.47,6810 U3.19@6048.61,6746.86
  Bottom Layer w10: P1.15@4969.22,6541.32 5001,6541.32 5019,6559.32 5019,6846.32 5053.06,6880.38 5355.25,6880.38 5380,6855.63 v1(5380,6801)
PG6: P2.34 U3.91 | length 1271.9
  Top Layer w10: U3.91@6699.84,6145.78 6730.62,6115 6751,6115 v1(6759,6107)
  Bottom Layer w10: v1(6759,6107) 6780,6128 6818.5,6128 6829.42,6117.08 6839.92,6117.08 7280,5677 7656.32,5677 7707,5626.32 P2.34@7739.22,5626.32
PG7: P2.33 U3.92 | length 1179
  Top Layer w10: U3.92@6713.04,6159.45 6743.49,6129 6775,6129 6797,6107 v1(6781,6107)
  Bottom Layer w10: v1(6781,6107) 6784,6104 6832,6104 7309.68,5626.32 P2.33@7639.22,5626.32
PG9: P2.14 U3.124 | length 1175.3
  Top Layer w10: U3.124@6717.2,6730.95 6787.63,6801.38 6807.76,6801.38 6812.71,6806.33 6903.81,6806.33 v1(6954.11,6756.03)
  Bottom Layer w10: v1(6954.11,6756.03) 7006.38,6703.76 7306.24,6703.76 7423.14,6586.86 7677.86,6586.86 7692,6601 7739.22,6601 P2.14@7739.22,6626.32
PG11: P2.12 U1.16 U3.126 | length 2235.3
  Top Layer w10: U1.16@6364.06,7241.32 6364.06,7050.34 6376.4,7038 v1(6434,7038) ; v1(6668,6629) 6655.98,6641.02 6655.98,6688.48 6668.12,6700.62 6668.12,6723.88 6666,6726 6666,6734.89 U3.126@6689.15,6758.04 6724.99,6793.88 6755.41,6793.88 v1(6833.67,6872.14)
  Bottom Layer w10: v1(6434,7038) 6434,6863 v1(6668,6629) ; v1(6833.67,6872.14) 7763.86,6872.14 7779,6857 7779,6726.32 P2.12@7739.22,6726.32
PG13: P2.10 U1.17 U3.128 | length 2856
  Top Layer w10: U1.17@6383.75,7241.32 6383.75,7222.7 6482.89,7123.56 v1(6588.92,7123.56) ; v1(6621,6735) 6637,6751 6637,6761.03 U3.128@6661.1,6785.13
  Bottom Layer w10: v1(6588.92,7123.56) 6593.16,7127.8 6614.16,7127.8 6659,7082.96 6659,6873.96 6722.43,6810.53 6740.03,6810.53 ; v1(6621,6735) 6664.5,6735 6740.03,6810.53 ; P2.10@7739.22,6826.32 7699.9,6787 ; 6740.04,6810.53 7022.47,6810.53 ; 6740.03,6810.53 7022.47,6810.53 ; 7022.47,6810.53 7026,6807 7349,6807 ; 7022.47,6810.53 7345.47,6810.53 7349,6807 ; 7349,6807 7369,6787 ; 7369,6787 7699.9,6787 ; 7369,6787 7370,6786 7698.9,6786 7699.9,6787
PG14: P2.9 U1.18 U3.129 | length 1729.9
  Top Layer w10: U1.18@6403.43,7241.32 6403.43,7222.84 6473.27,7153 6585,7153 6608,7130 v1(6608,7112) ; v1(6605,6745) 6605,6757.32 U3.129@6646.71,6799.03 6646.71,6802.71 6668.79,6823.19 6695.71,6820.29 6699.24,6816.76 6733.63,6816.76 6743,6826.12 v1(6743,6827)
  Bottom Layer w10: v1(6605,6745) 6605,7109 v1(6608,7112) ; v1(6743,6827) 7586.32,6827 7587,6826.32 P2.9@7639.22,6826.32
PG15: P2.8 U3.132 | length 1673.7
  Top Layer w10: U3.132@6604.27,6840.01 6566,6801.74 6566,6690 6824,6432 v1(6831,6432) ; v1(7212,6487) 7610,6885 7737.22,6885 7739.22,6887 P2.8@7739.22,6926.32
  Bottom Layer w10: v1(6831,6432) 6886,6487 v1(7212,6487)
POWER_1: POWER.1 R46.1 | length 329.3
  Top Layer w10: R46.1@4567.11,3750.62 4665,3750.62 4704.62,3790.24 4704.62,3936.38 4700.38,3940.62 POWER.1@4677.11,3940.62
Q1_1: Q1.1 R30.2 | length 378.2
  Top Layer w10: R30.2@5949.22,7814.32 6105,7814.32 6117.73,7801.59 6117.73,7659.73 6089.85,7631.85 Q1.1@6089.85,7608.72
Q2_3: Q2.3 R36.1 | length 175.6
  Top Layer w10: Q2.3@7393.59,7381.32 7399.22,7381.32 R36.1@7399.22,7211.32
Q3_1: Q3.1 R47.2 R49.2 | length 5881.8
  Top Layer w10: R47.2@5350.11,6400.62 5350.11,6427.11 5351.52,6428.52 5443.48,6428.52 5464,6408 5545,6408 v1(5547,6406) ; v1(7744.85,4352.69) Q3.1@7744.85,4323.72 7877.28,4323.72 7944.12,4256.88 R49.2@7944.12,3890.62
  Bottom Layer w10: v1(5547,6406) 5130,5989 5061.59,5989 5028,5955.41 5028,5925.41 4991.91,5889.32 4940.32,5889.32 4904.22,5853.22 4904.22,4760.22 5353.47,4310.98 7703.13,4310.98 v1(7744.85,4352.69)
Q3_3: D4.1 FMQ1.2 Q3.3 | length 1452.6
  Top Layer w10: D4.1@7799.22,4612.63 7779.63,4612.63 7759.83,4592.83 ; Q3.3@7823.59,4286.32 7725,4286.32 7718.64,4292.68 7718.64,4551.64 7759.83,4592.83 ; FMQ1.2@8610,4402 8576,4436 7829.66,4436 7759.83,4505.83 7759.83,4592.83
R14_1: C17.2 R14.1 R60.2 | length 227.4
  Top Layer w10: C17.2@5726.78,5126.32 5731.22,5126.32 R60.2@5731.22,5036.32 R14.1@5864.22,5036.32
R25_1: D3.2 Q1.3 R25.1 | length 3330.9
  Top Layer w10: Q1.3@6168.59,7571.32 6168.59,7466.41 v1(6245,7390) ; v1(6844,5063) 7051.32,5063 D3.2@7065.51,5048.81 ; D3.2@7065.51,5036.32 D3.2@7065.51,5048.81 ; R25.1@7169.22,5041.32 7137.72,5041.32 ; D3.2@7065.51,5048.81 7065.51,5054.32 7124.72,5054.32 7137.72,5041.32 ; D3.2@7065.51,5048.81 7073,5041.32 7137.72,5041.32
  Bottom Layer w10: v1(6245,7390) 6252,7383 6252,6637 6115.53,6500.53 6115.53,6461.47 6508,6069 6508,5842.61 6844,5506.61 v1(6844,5063)
R33_2: Q2.1 R33.2 | length 115.9
  Top Layer w10: R33.2@7206.22,7436.32 7237.72,7436.32 7255.32,7418.72 Q2.1@7314.85,7418.72
R54_1: R52.2 R54.1 R55.1 | length 964.5
  Top Layer w10: R52.2@4366.22,5706.32 4366.22,5660.78 4388.14,5638.86 4569.86,5638.86 4729.22,5798.22 ; R54.1@4729.22,5531.32 4729.22,5798.22 ; R55.1@4757.11,6000.62 4757.11,5927.11 4729.22,5899.22 4729.22,5798.22
R60_1: R60.1 TFT_LCD1.31 | length 175
  Top Layer w10: TFT_LCD1.31@5654.22,4871.32 5654.22,5036.32 R60.1@5664.22,5036.32
RESET: C24.2 D3.1 R17.1 RESET.1 TFT_LCD1.5 U3.25 | length 6209.5
  Top Layer w10: RESET.1@4102.11,7964.62 4102.11,7824.11 4102,7824 4102,7714.73 RESET.1@4102.11,7714.62 4155.41,7661.32 R17.1@4584.22,7661.32 4584.22,7686.44 4587.05,7689.27 4675.73,7689.27 4702,7663 4702,7659 5081,7280 5086,7280 5251,7115 5251,7109 5333.16,7026.84 5363.84,7026.84 5390,7053 5437,7053 5437,7200.64 5499.18,7262.82 5559.18,7262.82 5753,7069 v1(6025,7069) ; v1(5920,6708.62) U3.25@5966.64,6661.98 6131.62,6497 v1(6131.62,6481) ; v1(6872,4961.22) TFT_LCD1.5@6954.22,4879 ; TFT_LCD1.5@6954.22,4871.32 TFT_LCD1.5@6954.22,4879 ; D3.1@6982.91,5036.32 6965.54,5036.32 6954.22,5025 TFT_LCD1.5@6954.22,4879 ; C24.2@7177.22,5156.32 7200,5156.32 v1(7200,5187)
  Bottom Layer w10: v1(5920,6708.62) 6025,6813.62 v1(6025,7069) ; v1(6131.62,6481) 6476.12,6136.5 6587.12,6136.5 6611,6112.62 6611,5758 6872,5497 v1(6872,4961.22) ; TFT_LCD1.5@6954.22,4871.32 6954.22,5018 6998,5061.78 6998,5084.78 7100.22,5187 v1(7200,5187)
RS485_RE: P2.32 U3.93 U8.2 U8.3 | length 4798.2
  Top Layer w10: U8.3@4354.22,5031.32 4354.22,5070.32 ; U8.2@4404.22,5031.32 4404.22,5070.32 4354.22,5070.32 ; v1(5481,5561) 5340,5561 5207.06,5693.94 4946.94,5693.94 4811,5558 4811,5541 4733,5463 4471.22,5463 4354.22,5346 4354.22,5070.32 ; v1(6427,6053) 6435,6061 6520,6061 v1(6528,6069) ; v1(6580,6121) 6654,6195 6715,6195 6726.93,6183.07 U3.93@6726.93,6173.84 6756.77,6144 v1(6783,6144)
  Bottom Layer w10: v1(5481,5561) 5965.02,6045.02 6284.98,6045.02 6395.61,5934.39 6416.39,5934.39 6427,5945 v1(6427,6053) ; v1(6528,6069) v1(6580,6121) ; v1(6783,6144) 6783,6199.5 6849.47,6265.97 7216.35,6265.97 7471,6011.32 7471,5926.32 7613.32,5784 7656.32,5784 7714,5726.32 P2.32@7739.22,5726.32
RXD: P4.4 U5.3 | length 753.5
  Top Layer w10: U5.3@5767.22,7871.32 v1(5767.22,7984.78)
  Bottom Layer w10: P4.4@5677.12,8530.62 5632,8485.5 5632,8120 v1(5767.22,7984.78) 5781,7971
SD_CARD_10: SD_CARD.10
SDIO_CMD: P2.20 R28.1 SD_CARD.2 U3.116 | length 5574.6
  Top Layer w10: U3.116@6830.86,6621.19 6862,6652.33 v1(6862,6670) ; v1(7004,6651) 7013,6660 7028,6660 7038.61,6649.39 7038.61,5901.61 ; v1(7173,4573) 7069,4573 6999,4643 6999,4665 6917,4747 6917,4758 6826.49,4848.51 6826.49,5689.49 7038.61,5901.61 ; R28.1@7384.22,6826.32 7384.22,6756 7183.22,6555 ; P2.20@7739.22,6326.32 7690,6375.54 7690,6731.15 7655.35,6765.8 7623.35,6765.8 7253.61,6396.06 7253.61,6313.12 7191,6313.12 7191,6384 7183.22,6391.78 7183.22,6555 ; 7038.61,5901.61 7098,5961 7098,6469.78 7183.22,6555
  Bottom Layer w10: v1(6862,6670) 6875,6657 6991,6657 6997,6651 v1(7004,6651) ; v1(7173,4573) 7198,4573 7262.95,4637.95 7523.6,4637.95 7528.55,4633 SD_CARD.2@7528.55,4553.54
SDIO_D0: P2.29 R31.1 SD_CARD.7 U3.98 | length 3775.2
  Top Layer w10: v1(6767,6286.07) 6767,6273.75 U3.98@6795.7,6245.05 ; P2.29@7639.22,5826.32 7688.9,5876 7745,5876 7829.5,5960.5 ; v1(7915.67,5000.33) 7915.67,5429.99 7940.75,5455.06 7940.75,5514.25 7916,5539 7897,5539 7831.5,5604.5 7831.5,5958.5 7829.5,5960.5 ; R31.1@7979.22,6661.32 7979.22,6058.22 7931.12,6010.12 7883.12,6010.12 ; 7829.5,5960.5 7879.12,6010.12 ; 7879.12,6010.12 7883.12,6010.12 ; 7879.12,6010.12 7881.12,6008.12 7883.12,6010.12
  Bottom Layer w10: v1(6767,6286.07) 7287.73,6286.07 7495,6078.8 7495,5921 7589.68,5826.32 P2.29@7639.22,5826.32 ; v1(7915.67,5000.33) 8019.86,4896.14 8019.86,4746.21 8008.55,4734.89 SD_CARD.7@8008.55,4553.54
SDIO_D1: P2.28 R32.1 SD_CARD.8 U3.99 | length 3282.4
  Top Layer w10: v1(6733.11,6416.11) 6733.11,6354.34 6783,6304.45 6783,6284.62 U3.99@6808.9,6258.72 ; R32.1@7537.12,5970.62 7561.62,5970.62 ; v1(7568,6106) 7567,6105 7567,6084.74 7578.31,6073.42 7578.31,5987.31 7561.62,5970.62 ; P2.28@7739.22,5926.32 7694.92,5970.62 7561.62,5970.62
  Bottom Layer w10: v1(6733.11,6416.11) 6800,6483 6800,6507 6840.63,6547.63 6922.87,6547.63 6945.5,6525 7232,6525 7568,6189 v1(7568,6106) ; P2.28@7739.22,5926.32 7868,5926.32 8083.55,5710.77 SD_CARD.8@8083.55,4553.54
SDIO_D2: P2.23 R26.1 SD_CARD.9 U3.111 | length 3341.2
  Top Layer w10: U3.111@6901.36,6553.12 6879.8,6531.56 6879.8,6500.75 v1(6970.55,6410) ; v1(7390,4585) 7506.67,4701.67 7506.67,4894.87 7272.72,5128.82 7147.72,5128.82 7147.72,5193 7357,5402.28 7357,6152 7450.88,6245.88 7547.12,6245.88 R26.1@7547.12,6230.62 v1(7490.6,6230.62) ; v1(7585,6098) 7613.32,6126.32 P2.23@7639.22,6126.32
  Bottom Layer w10: v1(6970.55,6410) 7296.02,6410 7460.14,6245.88 7475.34,6245.88 v1(7490.6,6230.62) 7490.6,6198.62 7537.27,6151.95 7537.27,6114.17 7561.22,6090.22 7577.22,6090.22 v1(7585,6098) ; SD_CARD.9@7350.55,4554.54 7350.55,4585 v1(7390,4585)